# Altium PCB IMU_Board_CG_Rev1a.PcbDoc
Units mil, origin at the board's own origin, x right, y up, seen from the top; angles counter-clockwise.
Board outline 3000 x 2000 mil, 2 copper layers (Top Layer, Bottom Layer); 60 components, 36 nets, 212 pads, 57 vias.
Unrouted connection lines stored in the file: 5.
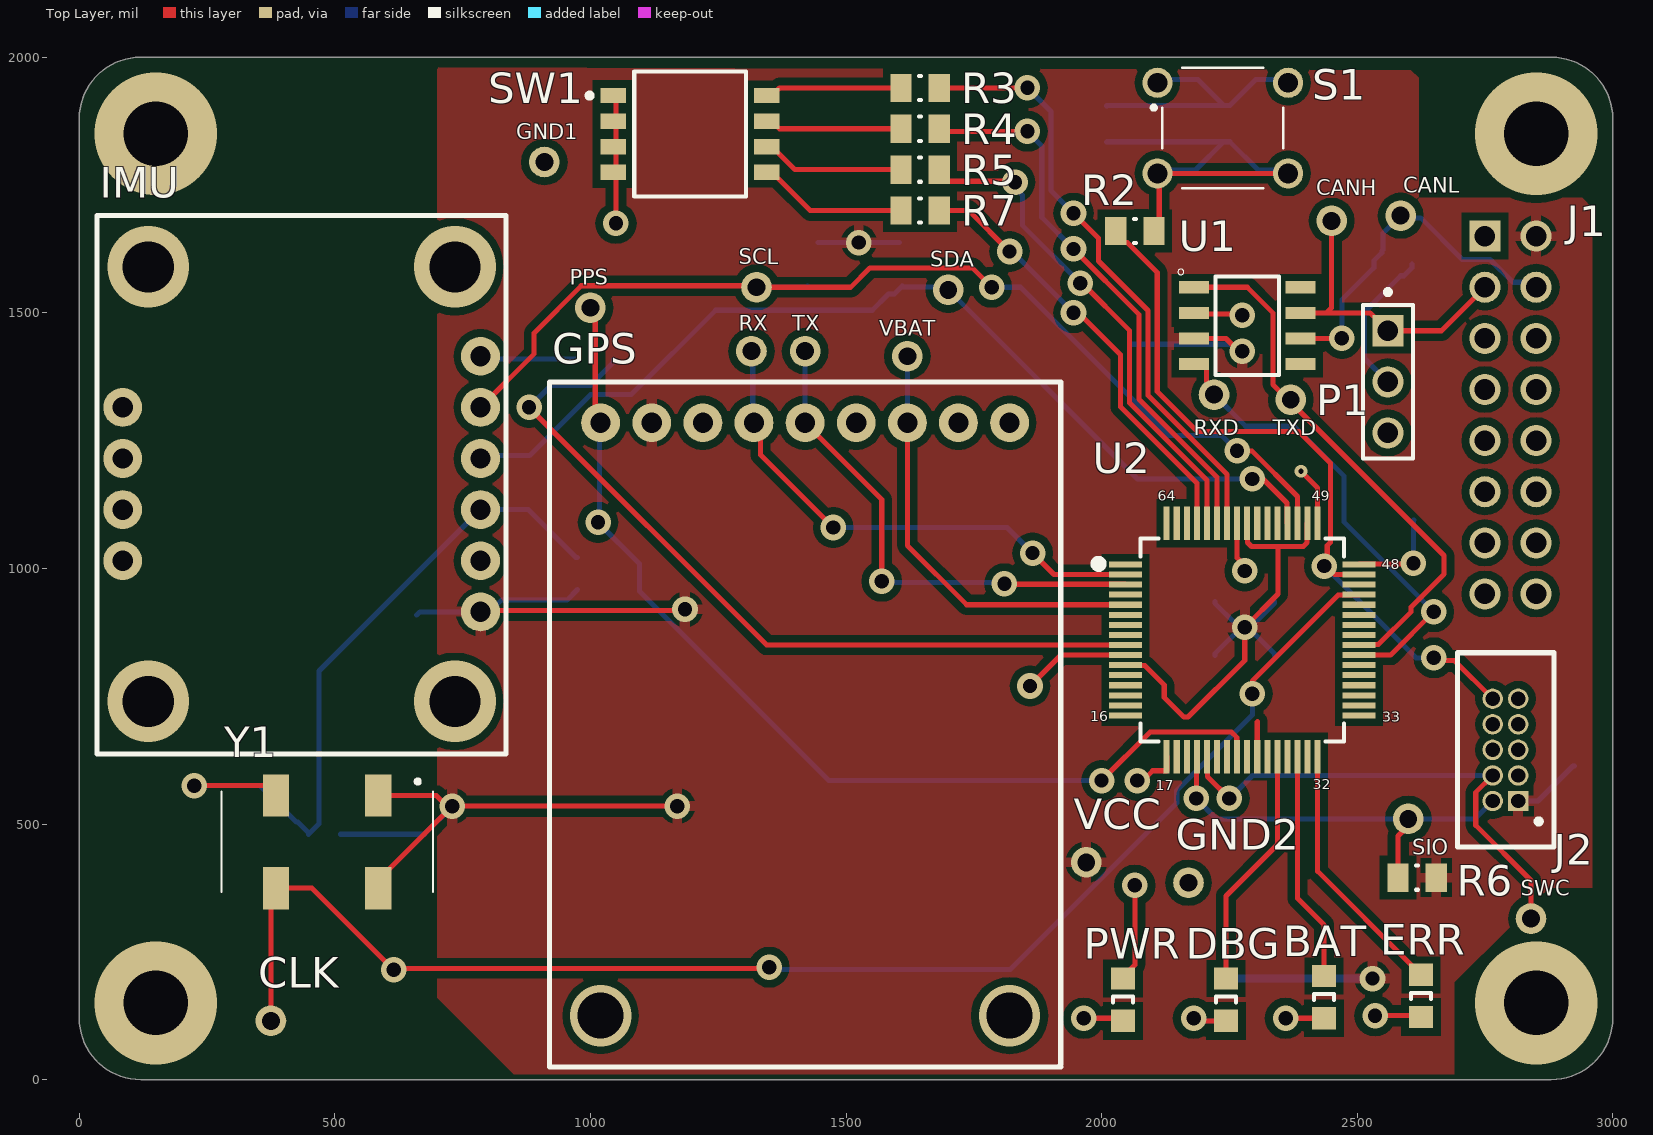
[diagram p0: Top Layer view]
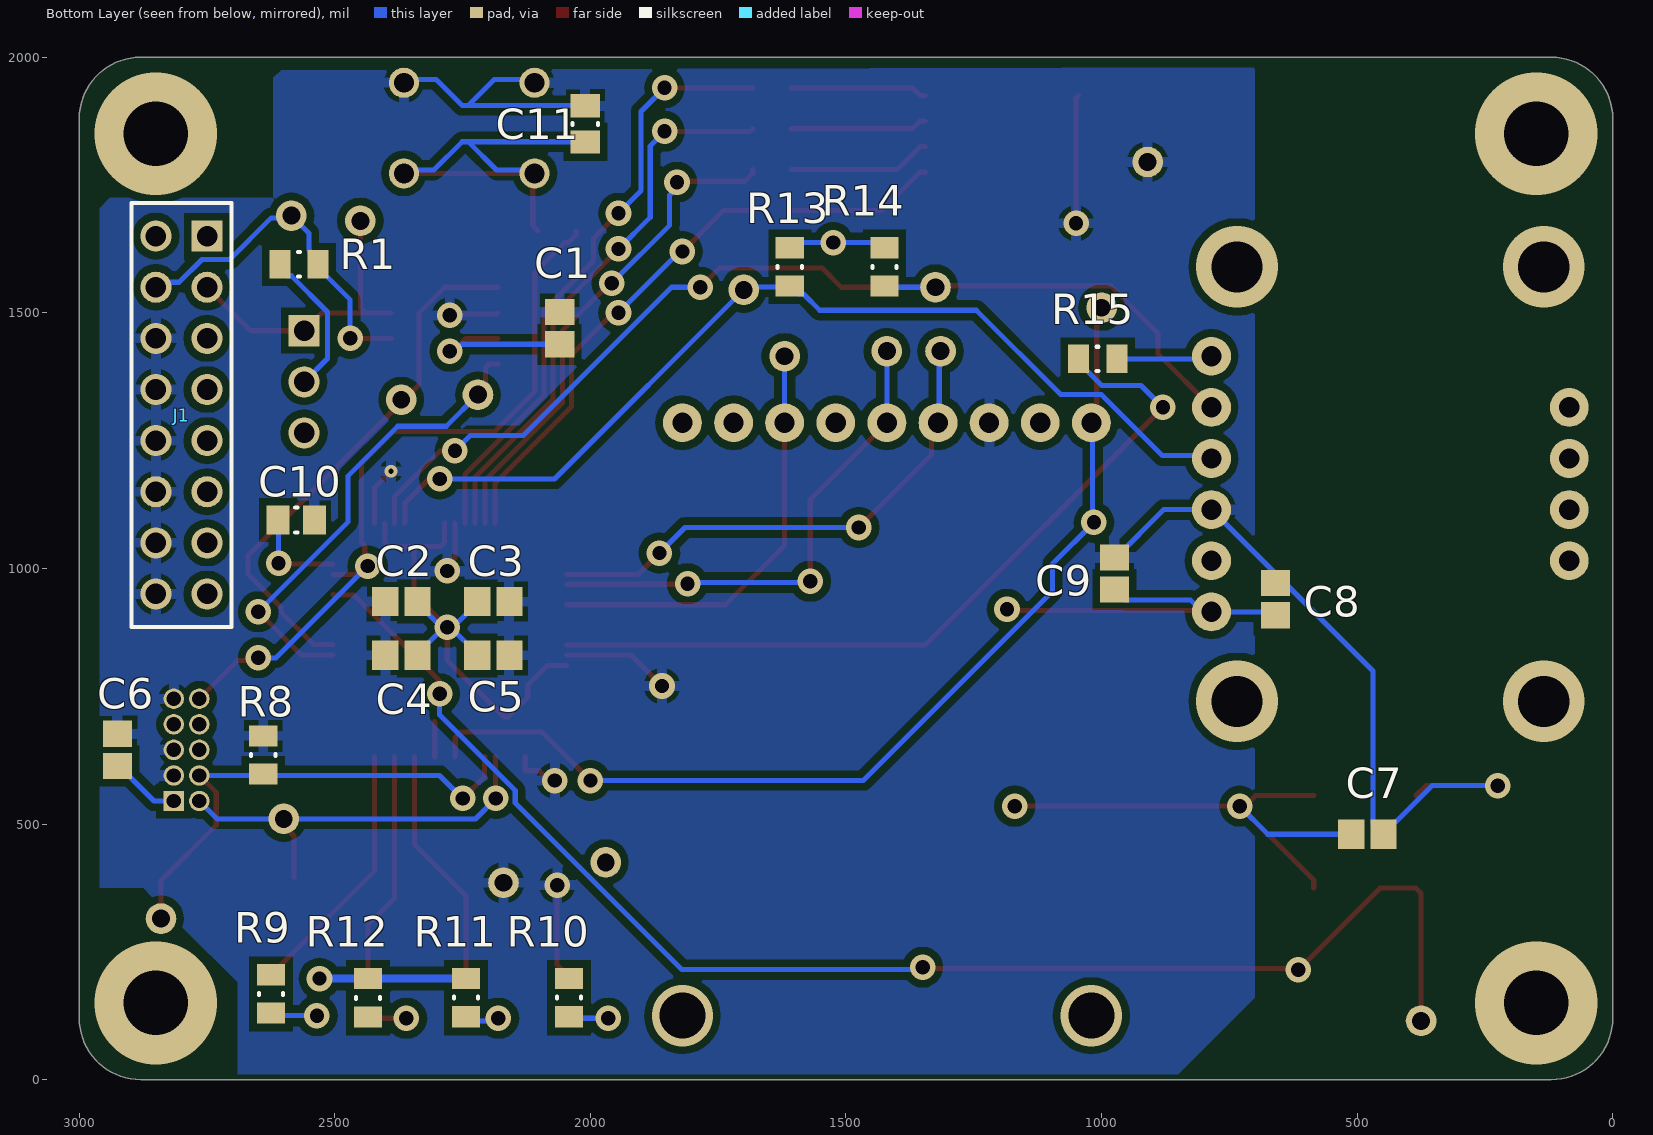
[diagram p1: Bottom Layer view, seen from below]
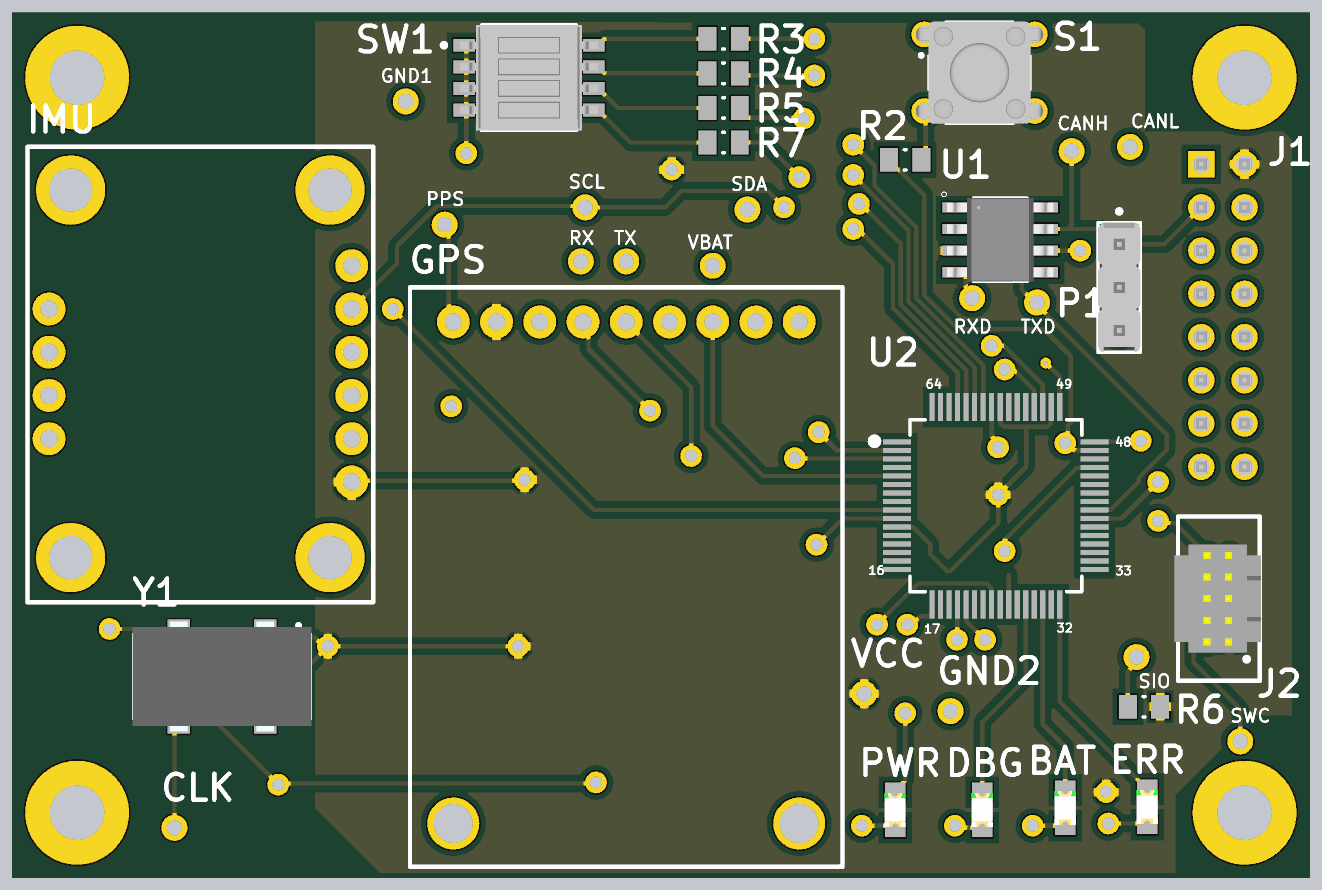
[diagram p2: 3D render of the assembled board from above, using the file's embedded part models]

## Layer stack, top to bottom
Top Solder: solder mask 0.4, Solder Resist, Dk 3.5
Top Layer: signal copper 1.4
Dielectric 1: dielectric 12.6, FR-4, Dk 4.8
Bottom Layer: signal copper 1.4
Bottom Solder: solder mask 0.4, Solder Resist, Dk 3.5

## Board outline
120,0 2880,0 ccw(c2880,120) 3000,120 3000,1880 ccw(c2880,1880) 2880,2000 120,2000 ccw(c120,1880) 0,1880 0,120 ccw(c120,120)

## Design rules (kind name [scope] priority, off if disabled: settings)
BoardOutlineClearance [All] p1: gap=10 ignorepadtopadclearanceinfootprint=FALSE
Clearance [All] p1: gap=5 ignorepadtopadclearanceinfootprint=TRUE except(0: Arc-Hole Track-Hole SMDPad-Hole THPad-Hole Via-Hole Fill-Hole Poly-Hole Region-Hole Text-Hole; 8: Track-Track Track-SMDPad Track-THPad Track-Via; 10: Poly-Poly; 15: Arc-Poly Track-Poly SMDPad-Poly THPad-Poly Via-Poly Fill-Poly)
ComponentClearance [All] p1: gap=0 collisioncheckmode=3 verticalgap=100000 showdistances=FALSE
Height [All] p1: minheight=0 maxheight=2000 prefheight=500
HoleSize [All] p1: absolutevalues=TRUE maxlimit=200 minlimit=10 maxpercent=80.000 minpercent=20.000
MinimumAnnularRing [All] p1: minimumring=6
MinimumSolderMaskSliver [All] p1: minsoldermaskwidth=5
PlaneConnect [All] p1: planeconnectstyle=Relief reliefexpansion=20 reliefentries=4 reliefconductorwidth=20 reliefairgap=10
PolygonConnect [All] p1: connectstyle=Relief reliefconductorwidth=20 reliefentries=4 polygonreliefangle="90 Angle" airgapwidth=10
RoutingVias [All] p1: holewidth=28 width=50 viastyle="Through Hole" minholewidth=28 minwidth=50 maxholewidth=28 maxwidth=50
SilkToSolderMaskClearance [IsPad] p1: minsilkscreentomaskgap=5 clearancetoexposedcopper=TRUE
SolderMaskExpansion [All] p1: expansion=4 istentingtop=FALSE
Width [All] p1: maxlimit=10 minlimit=10 preferedwidth=10
24 further rules are at their usual default settings.

## Classes and differential pairs
component class IMU_Board_MC_CG: BAT C1 C2 C3 C4 C5 C6 C7 C10 C11 CANH CANL CLK DBG ERR GND1 GND2 J1 J2 P1 PWR R1 R2 R3 R4 R5 R6 R7 R8 R9 R10 R11 R12 RXD S1 SIO SW1 TXD U1 U2 VCC Y1
component class IMU_Board_IMU_CG: C8 C9 GPS IMU PPS R13 R14 R15 RX SCL SDA TX VBAT

## Components (designator, comment, footprint, x,y, rotation, side; value= is the part's Value field where it differs from the comment)
BAT "LED" 0805_A 2435,161.33 r270 top
C1 "Capacitor 0805" "Cap 0805" 2060,1470 r270 bottom
C2 "Capacitor 0805" "Cap 0805" 2370,935 r0 bottom
C3 "Capacitor 0805" "Cap 0805" 2190,935 r180 bottom
C4 "Capacitor 0805" "Cap 0805" 2370,830 r0 bottom
C5 "Capacitor 0805" "Cap 0805" 2190,830 r180 bottom
C6 "Capacitor 0805" "Cap 0805" 2925,645 r270 bottom
C7 "Capacitor 0805" "Cap 0805" 480,480 r0 bottom
C8 "Capacitor 0805" "Cap 0805" 660,940 r270 bottom
C9 "Capacitor 0805" "Cap 0805" 975,990 r270 bottom
C10 "1uF" CAPC0805(2012)130_N 2575.43,1095 r180 bottom value=390pF
C11 ".1uF" CAPC0805(2012)130_N 2010,1869.57 r90 bottom value=390pF
CANH "Test Point" "Test Point Through-hole" 2475,1660 r90 top
CANL "Test Point" "Test Point Through-hole" 2610,1670 r90 top
CLK "Test Point" "Test Point Through-hole" 400,95 r90 top
DBG "LED" 0805_A 2243.33,156.33 r270 top
ERR "LED" 0805_A 2625,163.66 r270 top
F1 "Screw Hole" "Screw Hole" 150,1850 r0 top locked
F2 "Screw Hole" "Screw Hole" 2850,1850 r0 top locked
F3 "Screw Hole" "Screw Hole" 150,150 r0 top locked
F4 "Screw Hole" "Screw Hole" 2850,150 r0 top locked
GND1 "Test Point" "Test Point Through-hole" 935,1775 r90 top
GND2 "Test Point" "Test Point Through-hole" 2195,365 r90 top
GPS "MTK3339 Breakout" "MTK3339 Breakout" 1920,1365 r180 top
IMU "BNO055 Breakout" "BNO055 Breakout" 835,635 r90 top
J1 "Stacking Header" SMTC-SSQ-108-02-X-D 2750,1650 r270 bottom locked
J2 "Programming Header" programming3D 2906.77,449.72 r90 top
P1 "Jumper" MOLX-22-28-4033_V 2560,1365 r270 top
PPS "Test Point" "Test Point Through-hole" 1025,1490 r90 top
PWR "LED" 0805_A 2041.67,156.33 r270 top
R1 "120R" RESC0805(2012)_N 2570,1595 r0 bottom value="120.00 Ohm"
R2 "100" RESC0805(2012)_N 2065,1660 r0 top value="120.00 Ohm"
R3 "100" RESC0805(2012)_N 1645,1940 r0 top value="120.00 Ohm"
R4 "100" RESC0805(2012)_N 1645,1860 r0 top value="120.00 Ohm"
R5 "100" RESC0805(2012)_N 1645,1780 r0 top value="120.00 Ohm"
R6 "47k" RESC0805(2012)_N 2617.4,395 r0 top value="120.00 Ohm"
R7 "100" RESC0805(2012)_N 1645,1700 r0 top value="120.00 Ohm"
R8 "47k" RESC0805(2012)_N 2640,635 r270 bottom value="120.00 Ohm"
R9 "120" RESC0805(2012)_N 2625,167.6 r90 bottom value="120.00 Ohm"
R10 "120" RESC0805(2012)_N 2041.67,160.27 r90 bottom value="120.00 Ohm"
R11 "120R" RESC0805(2012)_N 2243.33,160.27 r90 bottom value="120.00 Ohm"
R12 "120R" RESC0805(2012)_N 2435,160 r90 bottom value="120.00 Ohm"
R13 "4.7k" RESC0805(2012)_N 1610,1590 r90 bottom value="120.00 Ohm"
R14 "4.7k" RESC0805(2012)_N 1425,1590 r90 bottom value="120.00 Ohm"
R15 "120" RESC0805(2012)_N 1007.6,1410 r180 bottom value="120.00 Ohm"
RX "Test Point" "Test Point Through-hole" 1295,1400 r0 top
RXD "Test Point" "Test Point Through-hole" 2245,1320 r90 top
S1 "1825910-7" "Switch 6mm 24V (NO)" 2237.05,1861.42 r0 top
SCL "Test Point" "Test Point Through-hole" 1350,1530 r90 top
SDA "Test Point" "Test Point Through-hole" 1725,1525 r90 top
SIO "Test Point" "Test Point Through-hole" 2625,490 r90 top
SW1 "TDA04H0SB1" CKCP-TDA04H0SB1R_V 1195,1850 r0 top
SWC "Test Point" "Test Point Through-hole" 2865,295 r90 top
TX "Test Point" "Test Point Through-hole" 1400,1400 r0 top
TXD "Test Point" "Test Point Through-hole" 2395,1310 r90 top
U1 "MCP2562-E/SN" SOIC127P600X175-8N 2285,1475 r0 top
U2 "CY8C4248AZI-L485" TQFP50P1200X1200X160-64N 2275,860 r0 top
VBAT "Test Point" "Test Point Through-hole" 1645,1395 r90 top
VCC "Test Point" "Test Point Through-hole" 1995,405 r90 top
Y1 "SG-636PCW_50.0000MC3__ROHS" SG-636_3D 485,465 r180 top

## Footprints (in the part's own frame and the unit in brackets; to place one, negate y for a bottom-side part, rotate by r counter-clockwise, add the part's x,y. Pads: shape width x height; smd on the part's side, far side on the other; paste and mask are expansions set on the pad)
0805_A [mm] "Chip LED, 2-Leads, Body 2.0x1.3mm, IPC Medium Density"
  rect 1.1x1.2 smd: 1(-1.05,0) 2(1.05,0)
  silkscreen extent -0.15,-0.5 0.15,0.5, body extent -1,-0.62 1,0.63, height 0.68
"BNO055 Breakout" [mil]
  round 76 hole 40: 1(280,50) 2(380,50) 3(480,50) 4(580,50) 5(680,50) 6(780,50) 7(680,750) 8(580,750) 9(480,750) 10(380,750)
  silkscreen extent 2,0 1055,800
"Cap 0805" [mm]
  rect 1.3x1.45 smd: 1(-0.8,0) 2(0.8,0)
  body extent -1.1,-0.72 1.1,0.72, height 1.4
CAPC0805(2012)130_N [mm] "Chip Capacitor, Body 2.0x1.2mm, Height 1.3mm, IPC Medium Density"
  rect 1.15x1.45 smd: 1(-0.9,0) 2(0.9,0)
  silkscreen extent -0.05,-0.62 0.05,0.63, body extent -1.1,-0.72 1.1,0.73, height 1.3
CKCP-TDA04H0SB1R_V [mm] "SMD, 8-Leads, Body 6.21x6.2mm, Pitch 1.27mm"
  rect 1.27x0.76 smd: 1(-3.81,1.905) 2(-3.81,0.635) 3(-3.81,-0.635) 4(-3.81,-1.905) 5(3.81,-1.905) 6(3.81,-0.635) 7(3.81,0.635) 8(3.81,1.905)
  silkscreen extent -5.12,-3.11 2.78,3.11, body extent -4.06,-3.1 4.06,3.11, height 2.3
MOLX-22-28-4033_V [mm] "THD, 3-Leads, Body 7.62x2.49mm, Pitch 2.54mm"
  rect 1.55x1.55 hole 1.02: 1(-2.54,0)
  round 1.55 hole 1.02: 2(0,0) 3(2.54,0)
  silkscreen extent -4.58,-1.24 3.81,1.24, body extent -3.81,-1.24 3.81,1.24, height 8.38
"MTK3339 Breakout" [mil]
  round 76 hole 39.37: 1(100,80) 2(200,80) 3(300,80) 4(400,80) 5(500,80) 6(600,80) 7(700,80) 8(800,80) 9(900,80)
  silkscreen extent 0,0 1000,1340
programming3D [mil]
  rect 40x40 hole 28 mask+3: 1(95.28,91.77)
  round 40 hole 28 mask+3: 2(95.28,141.77) 3(145.28,91.77) 4(145.28,141.77) 5(195.28,91.77) 6(195.28,141.77) 7(245.28,91.77) 8(245.28,141.77) 9(295.28,91.77) 10(295.28,141.77)
  silkscreen extent 5,22 385,211, body extent 70,19 320,219, height 226
RESC0805(2012)_N [mm] "Chip Resistor, Body 2.0x1.3mm, IPC Medium Density"
  rect 1.05x1.4 smd: 1(-0.95,0) 2(0.95,0)
  silkscreen extent -0.05,-0.6 0.05,0.6, body extent -1.1,-0.67 1.1,0.68, height 0.7
"Screw Hole" [mil]
SG-636_3D [mm]
  rect 1.3x2.1 smd: 1(-2.54,-2.3) 2(2.54,-2.3) 3(2.54,2.3) 4(-2.54,2.3)
  silkscreen extent -5.25,-3.1 5.25,2.5, body extent -5.25,-3.22 5.25,3.22, height 2.8
SMTC-SSQ-108-02-X-D [mm] "SQ Post Socket, 2x8 Pins, Vertical, 2.54mm Pitch, Female"
  rect 1.55x1.55 hole 1.02: 1(0,0)
  round 1.55 hole 1.02: 2(0,-2.54) 3(2.54,0) 4(2.54,-2.54) 5(5.08,0) 6(5.08,-2.54) 7(7.62,0) 8(7.62,-2.54) 9(10.16,0) 10(10.16,-2.54) 11(12.7,0) 12(12.7,-2.54) 13(15.24,0) 14(15.24,-2.54) 15(17.78,0) 16(17.78,-2.54)
  silkscreen extent -1.65,-3.74 19.43,1.2, body extent -1.52,-3.75 19.3,1.21, height 8.51
SOIC127P600X175-8N [mm]
  rect 1.5x0.6 smd: 1(-2.65,1.905) 2(-2.65,0.635) 3(-2.65,-0.635) 4(-2.65,-1.905) 5(2.65,-1.905) 6(2.65,-0.635) 7(2.65,0.635) 8(2.65,1.905)
  silkscreen extent -3.44,-2.45 1.58,2.81, body extent -3.12,-2.45 3.13,2.45, height 1.76
"Switch 6mm 24V (NO)" [mm]
  round 1.498 hole 0.99: 1a(-3.25,2.25) 1b(3.25,2.25) 2a(-3.25,-2.25) 2b(3.25,-2.25)
  silkscreen extent -3.53,-3 3,3, body extent -3.9,-2.99 3.9,3, height 5.01
"Test Point Through-hole" [mil]
  round 60 hole 35: 1(20,25)
TQFP50P1200X1200X160-64N [mm]
  rect 1.65x0.3 smd mask+0: 1(-5.801,3.75) 2(-5.801,3.25) 3(-5.801,2.75) 4(-5.801,2.25) 5(-5.801,1.75) 6(-5.801,1.25) 7(-5.801,0.75) 8(-5.801,0.25) 9(-5.801,-0.25) 10(-5.801,-0.75) 11(-5.801,-1.25) 12(-5.801,-1.75) 13(-5.801,-2.25) 14(-5.801,-2.75) 15(-5.801,-3.25) 16(-5.801,-3.75) 33(5.801,-3.75) 34(5.801,-3.25) 35(5.801,-2.75) 36(5.801,-2.25) 37(5.801,-1.75) 38(5.801,-1.25) 39(5.801,-0.75) 40(5.801,-0.25) 41(5.801,0.25) 42(5.801,0.75) 43(5.801,1.25) 44(5.801,1.75) 45(5.801,2.25) 46(5.801,2.75) 47(5.801,3.25) 48(5.801,3.75)
  rect 0.3x1.65 smd mask+0: 17(-3.75,-5.801) 18(-3.25,-5.801) 19(-2.75,-5.801) 20(-2.25,-5.801) 22(-1.25,-5.801) 23(-0.75,-5.801) 24(-0.25,-5.801) 25(0.25,-5.801) 26(0.75,-5.801) 27(1.25,-5.801) 28(1.75,-5.801) 29(2.25,-5.801) 30(2.75,-5.801) 31(3.25,-5.801) 32(3.75,-5.801) 49(3.75,5.801) 50(3.25,5.801) 51(2.75,5.801) 52(2.25,5.801) 53(1.75,5.801) 54(1.25,5.801) 55(0.75,5.801) 56(0.25,5.801) 57(-0.25,5.801) 58(-0.75,5.801) 59(-1.25,5.801) 60(-1.75,5.801) 61(-2.25,5.801) 62(-2.75,5.801) 63(-3.25,5.801) 64(-3.75,5.801)
  rect 0.3x1.65 smd paste+0 mask+0: 21(-1.75,-5.801)
  silkscreen extent -7.33,-5.05 5.05,5.05, body extent -5.12,-5.12 5.12,5.12, height 1.6

## Part data
BAT DBG ERR PWR: "Standard 0805 LED", Color="Super Red", Manufacturer="Wuerth Elektronik", PartNumber=150080SS75000, ComponentLink1Description="Manufacturer URL", ComponentLink1URL=http://www.we-online.com, ComponentLink2Description=Datasheet, ComponentLink2URL=http://katalog.we-online.com/led/datasheet/150080SS75000.pdf, PackageReference=0805_A
C1 C2 C3 C4 C5 C6 C7 C8 C9: "Standard Capacitor", Capacitance=2.2µF, Case Size/Dimension=0805, Dielectric=X5R, Manufacturer=AVX, Package Description="2-Pin Surface Mount Device, Body 2.01 x 1.25 mm", Rated Voltage=10V, Tolerance (%)=±10%, Datasheet URL=http://datasheets.avx.com/cx5r.pdf, Datasheet Version=05/2016, Manufacturer URL=http://www.avx.com/, Mounting Technology=SurfaceMount, Package Reference=0805
C10 C11: library part CMP-1036-02603-1, "CAP 390pF 200V ±5% 0805 (2012 Metric) Thickness 1.3mm SMD", Case-EIA=0805, Case-Metric=2012, Rated Voltage="200 V", Tolerance=Â±5%, Max Thickness="1.3 mm", Technology=SMT
F1 F2 F3 F4: "Add 4 of these to your design for screw hole mounting"
J1: "SQ Post Socket, Through-hole, Vertical, -55 to 125 degC, 2.54 mm Pitch, 16-Pin, Female, RoHS", Manufacturer=Samtec, PartNumber=SSQ-108-02-G-D, Temperature Range="-55 to 125 degC", ComponentLink1Description="Manufacturer URL", ComponentLink1URL=http://www.samtec.com, ComponentLink2Description=Datasheet, ComponentLink2URL=http://www.samtec.com/documents/webfiles/pdf/SSQ_TH.PDF, ComponentLink3Description="Package Specification", ComponentLink3URL=http://www.samtec.com/documents/webfiles/cpdf/SSQ-1XX-XX-XXX-X-XX-XXX-XX-X-MKT.pdf, DatasheetVersion=F-214, Mounting Technology=Through-hole, Orientation=Vertical, PackageDescription="Assembly, Socket Strip .025[0.64] SQ Tail", PackageReference=SSQ-108-02-X-D, PackageVersion="BD, 6/1987", Pitch="2.54 mm", RoHS=True
P1: library part CMP-1676-00001-5, "Male Header, Pitch 2.54 mm, 1 x 3 Position, Height 8.38 mm, Tail Length 3.18 mm, RoHS, Bulk", Colour=Black, Current Rating="4 A", Manufacturer=Molex, Max Operating Temperature="75 degC", Min Operating Temperature="0 degC", Package Quantity=1, Voltage Rating="250 V", ComponentLink1Description="Manufacturer URL", ComponentLink1URL=http://www.molex.com/, ComponentLink2Description=Datasheet, ComponentLink2URL=http://www.molex.com/pdm_docs/sd/022284033_sd.pdf, Contact Finish=Gold, Contact Material=Brass, Contact Plating=Gold, DatasheetVersion="Rev. G, 01/2012", Height="8.38 mm", Lead Pitch="0.1 inch", Length="7.62 mm", Mount="Through Hole", Mounting Technology="Through Hole", PackageDescription="Male Header, Pitch 2.54 mm, 1 x 3 Position, Height 8.38 mm, Tail Length 3.18 mm", PackageReference=22-28-4033, Packaging=Bulk, Pins=3, REACH SVHC=Unknown, RoHSCompliant=true, Rows=1
R1 R2 R3 R4 R5 R6 R7 R8 R9 R10 R11 R12 R13 R14 R15: library part "Resistor 0805", "Generic 0805 Resistor", Case-EIA=0805, Case-Metric=2012, Power="0.125 W", Tolerance="5 %", Technology=SMT
S1: library part "Switch 6mm 24V (NO)", "FSM4JAH=6MM TACT SWITCH, HIGH TEMP", Contact_Current_Rating="50 mA", Package=None, Configuration_Pole-Throw="Single Pole - Single Throw", Digi-Key_Part_Number=450-1804-ND, Digi-Key_Purchase_URL=https://www.digikey.com/product-detail/en/te-connectivity-alcoswitch-switches/1825910-7/450-1804-ND/1731414?utm_source=snapeda&utm_medium=aggregator&utm_campaign=symbol, EU_RoHS_Compliance=Compliant, MF="TE Connectivity", MP=1825910-7, SnapEDA_Link=https://www.snapeda.com/parts/1825910-7/TE%20Connectivity%20ALCOSWITCH%20Switches/view-part/?ref=snap, TE_purchase_URL=https://www.te.com/usa-en/product-1825910-7.html?te_bu=Cor&te_type=disp&te_campaign=seda_glo_cor-seda-global-disp-prtnr-fy19-seda-model-bom-cta_sma-317_1&elqCampaignId=32493
SW1: library part "Dip Switch Array SMD Half-Pitch", "Ultra-Miniature Surface Mount Half-Pitch DIP Switch, 25 mA, 24 V, -40 to 85 degC, 8-Pin SMD, RoHS, Tube", Case\Package=DIP, Contact Current Rating="100 mA", Max Contact Resistance="100 mohm", Max Current Rating="25 mA", Max Operating Temperature="85 degC", Max Voltage Rating (DC)="24 V", Min Operating Temperature="-40 degC", Package Quantity=70, ComponentLink1Description=Datasheet, ComponentLink1URL=http://www.ck-components.com/media/1328/tda.pdf, Contact Finish=Gold, Contact Material=Copper, Contact Plating=Gold, Current Rating="100 mA", DatasheetVersion=02/2016, Height="2.3 mm", Lead Pitch="1.27 mm", Length="6.21 mm", Mount="Surface Mount", Mounting Technology="Surface Mount", PackageDescription="8-Pin Surface Mount Device, Body 6.21 x 6.2 mm, Pitch 1.27 mm", PackageReference=TDA04H0SB1R, Packaging=Rail/Tube, Pins=4, Radiation Hardening=No, REACH SVHC="No SVHC", RoHSCompliant=true, Throw Configuration=SPST, Voltage Rating (DC)="24 V"
U1: library part "CAN Tranceiver", "Microchip MCP2562-E/SN, CAN Transceiver 1MBps 1-channel IEC 61000-4-2, 8-Pin SOIC", Package="SO-8 Microchip", Availability=Unavailable, MF=Microchip, MP=MCP2562-E/SN, Price=None, SnapEDA_Link=https://www.snapeda.com/parts/MCP2562-E/SN/Microchip/view-part/?ref=snap
U2: library part "PSOC MC", "64 pin psoc", Part_Number=CY8C4248AZI-L485
Y1: library part Oscilator, "Standard Clock Oscillators", Arrow Part Number="SG-636PCW 50.0000MC3: ROHS", Manufacturer_Name="Epson Timing", Datasheet Link=http://www.mouser.com/ds/2/137/G-636PCE_en-1003252.pdf, Manufacturer_Part_Number="SG-636PCW 50.0000MC3: ROHS"

## Via types
v1: diameter 50, hole 28, Top Layer to Bottom Layer, 46 vias
v2: diameter 160, hole 100, Top Layer to Bottom Layer, 4 vias
v3: diameter 240, hole 126, Top Layer to Bottom Layer, 4 vias
v4: diameter 120, hole 90, Top Layer to Bottom Layer, 2 vias
v5: diameter 25, hole 10, Top Layer to Bottom Layer, 1 vias

## Nets (pads, with @x,y where several pads share a name; then routed paths per layer and width w, separated by ;. In a path a pad name is that pad's centre, name@x,y a point inside that pad or via, vN(x,y) a via of type N, cw(c..) or ccw(c..) an arc to the next point about the centre after c; other vN are vias at no path point)
3V3: C1.2 C2.1 C3.1 C4.1 C5.1 C6.2 C7.2 C8.2 C9.2 GPS.8 IMU.1 J1.2 J2.1 R6.2 R9.2 R10.2 R11.2 R12.2 R13.2 R14.2 U1.3 U2.11 U2.26 U2.50 U2.56 VCC.1 Y1.1 Y1.4 | length 3874.1
  Top Layer w10: Y1.4 585,390.2 729.8,535 v1(730,535) v1(1170,535) ; Y1.1 698.62,555.55 v1@719.18,535 ; IMU.1 787.5,917.5 1182.5,917.5 v1(1185,920) ; U2.11 2047.4,810.01 2084.49,810.01 2122.67,771.82 2122.67,747.33 2160.86,709.14 2169.14,709.14 2280,820 v1(2280,885) 2345,950 2345,1042.9 ; U1.3 2243.43,1450 2268.43,1425 v1(2275,1425) ; U2.56 2285.62,1087.6 2285.62,1050.51 2293.24,1042.9 2345,1042.9 ; U2.26 2304.53,699.53 2305,700 ; U2.50 2402.17,1087.6 2402.17,1050.51 2394.56,1042.9 2345,1042.9
  Bottom Layer w10: C7.2 675,480 v1(730,535) ; C8.2 666.5,915 IMU.1 802.86,915 825.77,937.91 954.41,937.91 C9.2 ; R14.2@1445,1637.4 v1(1525,1637.4) R13.2@1605,1637.4 ; C1.2 2250.67,1438.5 2264.18,1425 v1(2275,1425) ; C5.1 2221.5,832.95 2273.54,885 v1(2280,885) ; C3.1 2221.5,932.05 2260.89,892.65 2272.35,892.65 v1(2280,885) ; C4.1 2338.5,832.95 2286.46,885 v1(2280,885) ; C2.1 2338.5,932.05 2299.11,892.65 2287.65,892.65 v1(2280,885) ; J2.1 2853.54,545 2922.05,613.5 C6.2
  Bottom Layer w15: R11.2 v1(2530,197.67)
GND: C1.1 C2.2 C3.2 C4.2 C5.2 C6.1 C7.1 C8.1 C9.1 C10.2 C11.2 GND1.1 GND2.1 GPS.7 IMU.3 J1.6 J1.8 J1.10 J1.12 J1.14 J1.16 J2.3 J2.5 J2.9 PWR.1 R8.1 S1.1a S1.1b SW1.1 SW1.2 SW1.3 SW1.4 U1.2 U2.10 U2.17 U2.49 U2.57 Y1.2 | length 3023.5
  Top Layer w10: v1(225,575) 365.55,575 Y1.2 ; SW1.1 1050,1920 v1(1050,1675) ; v1(1860,770) 1920.47,830.47 U2.10 ; PWR.1 2040,199.33 2065,224.33 v1(2065,380) ; v1(2070,585) 2080.82,585 2099.97,604.14 2126.46,604.14 2127.36,605.05 U2.17 ; U1.2 2183.17,1497.5 2272.5,1497.5 v1(2275,1495) ; U2.57 2265.16,1020.67 2280,1005.82 v1(2280,995) ; v5(2390,1190) 2422.64,1157.36 U2.49
  Bottom Layer w10: v1(225,575) 353.5,575 424.96,503.54 427.91,503.54 448.5,482.95 C7.1 469.09,500.59 469.09,799.09 IMU.3 878.54,1115 972.05,1021.5 C9.1 ; C11.2 2010.43,1905.43 2239.09,1905.43 ; S1.1a@2112.86,1956.3 2188.23,1956.3 2239.09,1905.43 ; S1.1b@2368.76,1956.3 2301.78,1956.3 2250.91,1905.43 2239.09,1905.43
NetBAT_1: BAT.1 U2.30 | length 450.4
  Top Layer w10: U2.30 2383.27,354.52 2435,302.79 BAT.1
NetBAT_2: BAT.2 R12.1 | length 75
  Top Layer w10: v1(2360,120) BAT.2
NetC10_1: C10.1 U2.48 | length 193
  Top Layer w10: U2.48 2504.28,1008.54 2608.54,1008.54 v1(2610,1010)
  Bottom Layer w10: v1(2610,1010) 2610,1094.13 C10.1
NetC11_1: C11.1 R2.2 S1.2a S1.2b | length 910.5
  Top Layer w10: R2.2 2112.86,1670.46 S1.2a@2112.86,1779.14 ; S1.2a S1.2b
  Bottom Layer w10: C11.1 2010.43,1834.57 2239.09,1834.57 ; S1.2a@2112.86,1779.14 2183.66,1779.14 2239.09,1834.57 ; S1.2b@2368.76,1779.14 2306.34,1779.14 2250.91,1834.57 2239.09,1834.57
NetCANH_1: CANH.1 J1.3 P1.1 U1.7 | length 594.5
  Top Layer w10: U1.7 2440,1500 ; CANH.1 2450,1510 2440,1500 ; J1.3 2665,1465 P1.1 2525,1500 2440,1500
NetCANL_1: CANL.1 J1.4 R1.1 U1.6 | length 691.3
  Top Layer w10: U1.6 v1(2470,1450)
  Bottom Layer w10: v1(2470,1450) 2470,1525.51 2532.6,1588.11 2532.6,1601.89 2548.27,1617.56 2548.27,1621.12 2550.56,1623.42 2550.56,1655.56 CANL.1 2589.14,1685.86 2624.14,1685.86 2705.51,1604.49 2759.88,1604.49 2804.6,1559.76 2840.24,1559.76 J1.4
NetCLK_1: CLK.1 U2.45 Y1.3 | length 2809.2
  Top Layer w10: CLK.1 375,364.45 Y1.3 455.55,374.45 v1(615,215) 617.5,217.5 1347.5,217.5 v1(1350,220) ; v1(2295,755) 2295,780 2462.8,947.8 2502.6,947.8 U2.45
  Bottom Layer w10: v1(1350,220) 1355,215 1820.81,215 2147,541.19 2147,565.74 2295,713.74 v1(2295,755)
NetDBG_1: DBG.1 U2.28 | length 475.6
  Top Layer w10: DBG.1 2243.33,359.34 2343.9,459.9 U2.28
NetDBG_2: DBG.2 R11.1 | length 134.1
  Top Layer w10: v1(2180,120) 2185.01,114.99 DBG.2
  Bottom Layer w10: v1(2180,120) 2185.01,114.99 2235.46,114.99 R11.1
NetERR_1: ERR.1 U2.32 | length 511.6
  Top Layer w10: U2.32 2422.64,407.36 2606.38,223.62 2606.38,221.65 2623.03,205 ERR.1
NetERR_2: ERR.2 R9.1 | length 183.3
  Top Layer w10: v1(2535,125) 2622.32,125 ERR.2
  Bottom Layer w10: v1(2535,125) 2619.8,125 R9.1
NetGPS_3: GPS.3 U2.5 VBAT.1 | length 844.7
  Top Layer w10: GPS.3 1620,1045 1736.1,928.9 U2.5
  Bottom Layer w10: GPS.3 VBAT.1
NetGPS_5: GPS.5 TX.1 U2.3 | length 991.5
  Top Layer w10: GPS.5 1570,1135 v1(1570,975) ; v1(1810,970) 1810.95,969.05 2045.84,969.05 U2.3
  Bottom Layer w10: GPS.5 TX.1 ; v1(1570,975) 1572.5,972.5 1807.5,972.5 v1(1810,970)
NetGPS_6: GPS.6 RX.1 U2.2 | length 1021
  Top Layer w10: GPS.6 1332.63,1272.37 1332.63,1222.37 v1(1475,1080) ; v1(1865,1030) 1907.05,987.95 U2.2
  Bottom Layer w10: RX.1 1317.5,1422.5 1317.5,1287.5 GPS.6 ; v1(1475,1080) 1815,1080 v1(1865,1030)
NetGPS_9: GPS.9 PPS.1 U2.24 | length 2002.3
  Top Layer w10: PPS.1 1009.57,1500.43 1009.57,1295.43 GPS.9 ; v1(2000,585) 2095,680 2253.86,680 2264.38,669.49 2264.38,632.4 U2.24
  Bottom Layer w10: GPS.9 1017.5,1282.5 1017.5,1092.5 v1(1015,1090) 1095.96,1009.04 1095.96,955.3 1466.26,585 v1(2000,585)
NetIMU_4: IMU.4 R13.1 SDA.1 U2.52 | length 1933.5
  Top Layer w10: v1(2295,1175) 2315.8,1175 2362.8,1128 2362.8,1089.16 U2.52
  Bottom Layer w10: IMU.4 790.54,1220.54 881,1220.54 1000.46,1340 1080,1340 1245,1505 1551.32,1505 1583.25,1536.93 1594.33,1536.93 R13.1 1612.06,1550.54 1694.46,1550.54 SDA.1 2070,1175 v1(2295,1175)
NetIMU_5: IMU.5 R14.1 SCL.1 U2.51 | length 2076.3
  Top Layer w10: IMU.5 889.91,1419.91 889.91,1460.72 982.19,1553 1322,1553 SCL.1 1509.17,1550 1547.17,1588 1747,1588 v1(1785,1550) ; v1(2265,1230) 2293.74,1230 2383.27,1140.47 U2.51
  Bottom Layer w10: SCL.1 1422.4,1550 R14.1 ; v1(1785,1550) 1841.26,1550 2131.17,1260.09 2234.91,1260.09 v1(2265,1230)
NetIMU_6: IMU.6 R15.2 | length 187.3
  Bottom Layer w10: IMU.6 790,1410 R15.2
NetJ2_2: J2.2 R6.1 SIO.1 U2.20 | length 816.6
  Top Layer w10: v1(2185,550) 2185.71,550.71 2185.71,630.91 U2.20 ; R6.1 2580,476.47 2600,496.47 SIO.1
  Bottom Layer w10: v1(2185,550) 2225,510 SIO.1 2730,510 J2.2
NetJ2_4: J2.4 R8.2 SWC.1 U2.21 | length 971.8
  Top Layer w10: U2.21 2206.88,630.84 2206.88,593.12 v1(2250,550) ; J2.4 2732,562 2732,497.6 2840,389.6 SWC.1
  Bottom Layer w10: v1(2250,550) 2295,595 J2.4
NetJ2_10: J2.10 R2.1 U2.47 | length 1469.4
  Top Layer w10: R2.1 2027.6,1653.11 2043.27,1637.44 2050.16,1637.44 2108.92,1578.68 2108.92,1346.08 2187,1268 2385.74,1268 2448,1205.74 2448,1051.2 2441.37,1044.57 2441.37,1010.52 v1(2435.43,1004.57) ; v1@2435,1008.85 2455.9,987.95 U2.47 ; v1(2650,825) 2655,820 2690,820 J2.10
  Bottom Layer w10: v1(2435.43,1004.57) 2615,825 v1(2650,825)
NetP1_2: P1.2 R1.2 | length 291.2
  Bottom Layer w10: P1.2 2514.49,1410.51 2514.49,1501.72 2585.2,1572.44 2591.73,1572.44 2607.4,1588.11 R1.2
NetPWR_2: PWR.2 R10.1 | length 166.6
  Top Layer w10: v1(1965,120) 2046.68,120 PWR.2
  Bottom Layer w10: v1(1965,120) 2038.8,120 R10.1
NetR3_1: R3.1 SW1.8 | length 268.8
  Top Layer w10: SW1.8 1355.04,1925 1370.04,1940 R3.1
NetR3_2: R3.2 U2.58 | length 1186
  Top Layer w10: R3.2 v1(1855,1940) ; v1(1945,1695) 1993.93,1646.07 1993.93,1601.53 2090.92,1504.54 2090.92,1338.63 2245.47,1184.07 U2.58
  Bottom Layer w10: v1(1855,1940) 1901,1894 1901,1739 v1(1945,1695)
NetR4_1: R4.1 SW1.7 | length 268.8
  Top Layer w10: SW1.7 1355.04,1875 1370.04,1860 R4.1
NetR4_2: R4.2 U2.59 | length 1094.9
  Top Layer w10: R4.2 1687.4,1855 v1(1855,1855) ; v1(1945,1625) 2072.92,1497.08 2072.92,1331.17 2225.79,1178.3 U2.59
  Bottom Layer w10: v1(1855,1855) 1855,1854.43 1883,1826.43 1883,1687 v1(1945,1625)
NetR5_1: R5.1 SW1.6 | length 281.2
  Top Layer w10: SW1.6 1355.04,1825 1400.04,1780 R5.1
NetR5_2: R5.2 U2.60 | length 987.3
  Top Layer w10: R5.2 1682.4,1773.11 1698.07,1757.44 1828.82,1757.44 v1(1830.63,1755.63) ; v1(1958.13,1558.13) 1961.87,1558.13 2054.92,1465.08 2054.92,1323.72 2206.1,1172.53 U2.60
  Bottom Layer w10: v1(1830.63,1755.63) 1830.63,1744.81 1845,1730.44 1845,1671.26 v1(1958.13,1558.13)
NetR7_1: R7.1 SW1.5 | length 293.7
  Top Layer w10: SW1.5 1355.04,1775 1430.04,1700 R7.1
NetR7_2: R7.2 U2.61 | length 862.9
  Top Layer w10: R7.2 1740,1700 v1(1820,1620) ; v1(1945,1500) 1955,1500 2036.92,1418.08 2036.92,1316.26 2186.42,1166.76 U2.61
  Bottom Layer w10: v1(1820,1620) 1825,1620 v1(1945,1500)
NetR15_1: R15.1 U2.9 | length 1567.6
  Top Layer w10: v1(880,1315) 1344.92,850.08 2046.54,850.08 U2.9
  Bottom Layer w10: v1(880,1315) 923,1358 999.89,1358 1045,1403.11 R15.1
NetRXD_1: RXD.1 U1.4 U2.39 | length 927.1
  Top Layer w10: U1.4 2198.39,1400 2205.2,1393.19 2205.2,1365.63 2220,1350.82 RXD.1 ; U2.39 2565.47,830.47 v1(2650,915)
  Bottom Layer w10: RXD.1 2281.91,1278.09 2376.91,1278.09 2473.9,1181.1 2473.9,1091.1 v1(2650,915)
NetTXD_1: TXD.1 U1.1 U2.40 | length 1054.4
  Top Layer w10: U1.1 2285,1550 2335,1500 2335,1360 2367.5,1327.5 2670,1025 2670,988.74 2605.62,924.36 2605.62,915.32 2541.24,850.94 2504.16,850.94 U2.40
pads on no net: GPS.1 GPS.2 GPS.4 IMU.2 IMU.7 IMU.8 IMU.9 IMU.10 J1.1 J1.5 J1.7 J1.9 J1.11 J1.13 J1.15 J2.6 J2.7 J2.8 P1.3 U1.5 U1.8 U2.1 U2.4 U2.6 U2.7 U2.8 U2.12 U2.13 U2.14 U2.15 U2.16 U2.18 U2.19 U2.22 U2.23 U2.25 U2.27 U2.29 U2.31 U2.33 U2.34 U2.35 U2.36 U2.37 U2.38 U2.41 U2.42 U2.43 U2.44 U2.46 U2.53 U2.54 U2.55 U2.62 U2.63 U2.64
copper on no net:
  other v2: 135,740 735,740 135,1590 735,1590
  other v3: 150,150 2850,150 150,1850 2850,1850
  other v4: 1020,125 1820,125

## Polygon pours and split planes (outlines as drawn)
3V3 on Top Layer "PWR" (solid, remove dead copper, pour order 1): 700,1980.41 700,160 855,5 2690,5 2690,190 2875,375 2960,375 2960,1705 2940,1725 2620,1725 2620,1960 2605,1975
GND on Bottom Layer "GND" (solid, remove dead copper, pour order 0): 700,1980.41 700,160 855,5 2690,5 2690,190 2875,375 2960,375 2960,1705 2940,1725 2620,1725 2620,1960 2605,1975

## Text inside footprints (layer, text, board x,y; h text height)
U2: Top Overlay "16" at 1977.35,701.13 h19.68; Top Overlay "17" at 2106,566 h19.68; Top Overlay "32" at 2413,568 h19.68; Top Overlay "33" at 2549,700 h19.68; Top Overlay "48" at 2548,998 h19.68; Top Overlay "49" at 2411,1132 h19.68; Top Overlay "64" at 2110,1132 h19.68